# Altium PCB Motorkort.PcbDoc
Units mm, origin at the board's own origin, x right, y up, seen from the top; angles counter-clockwise.
Board outline 60 x 90 mm, 2 copper layers (Top Layer, Bottom Layer); 29 components, 60 nets, 209 pads, 51 vias.
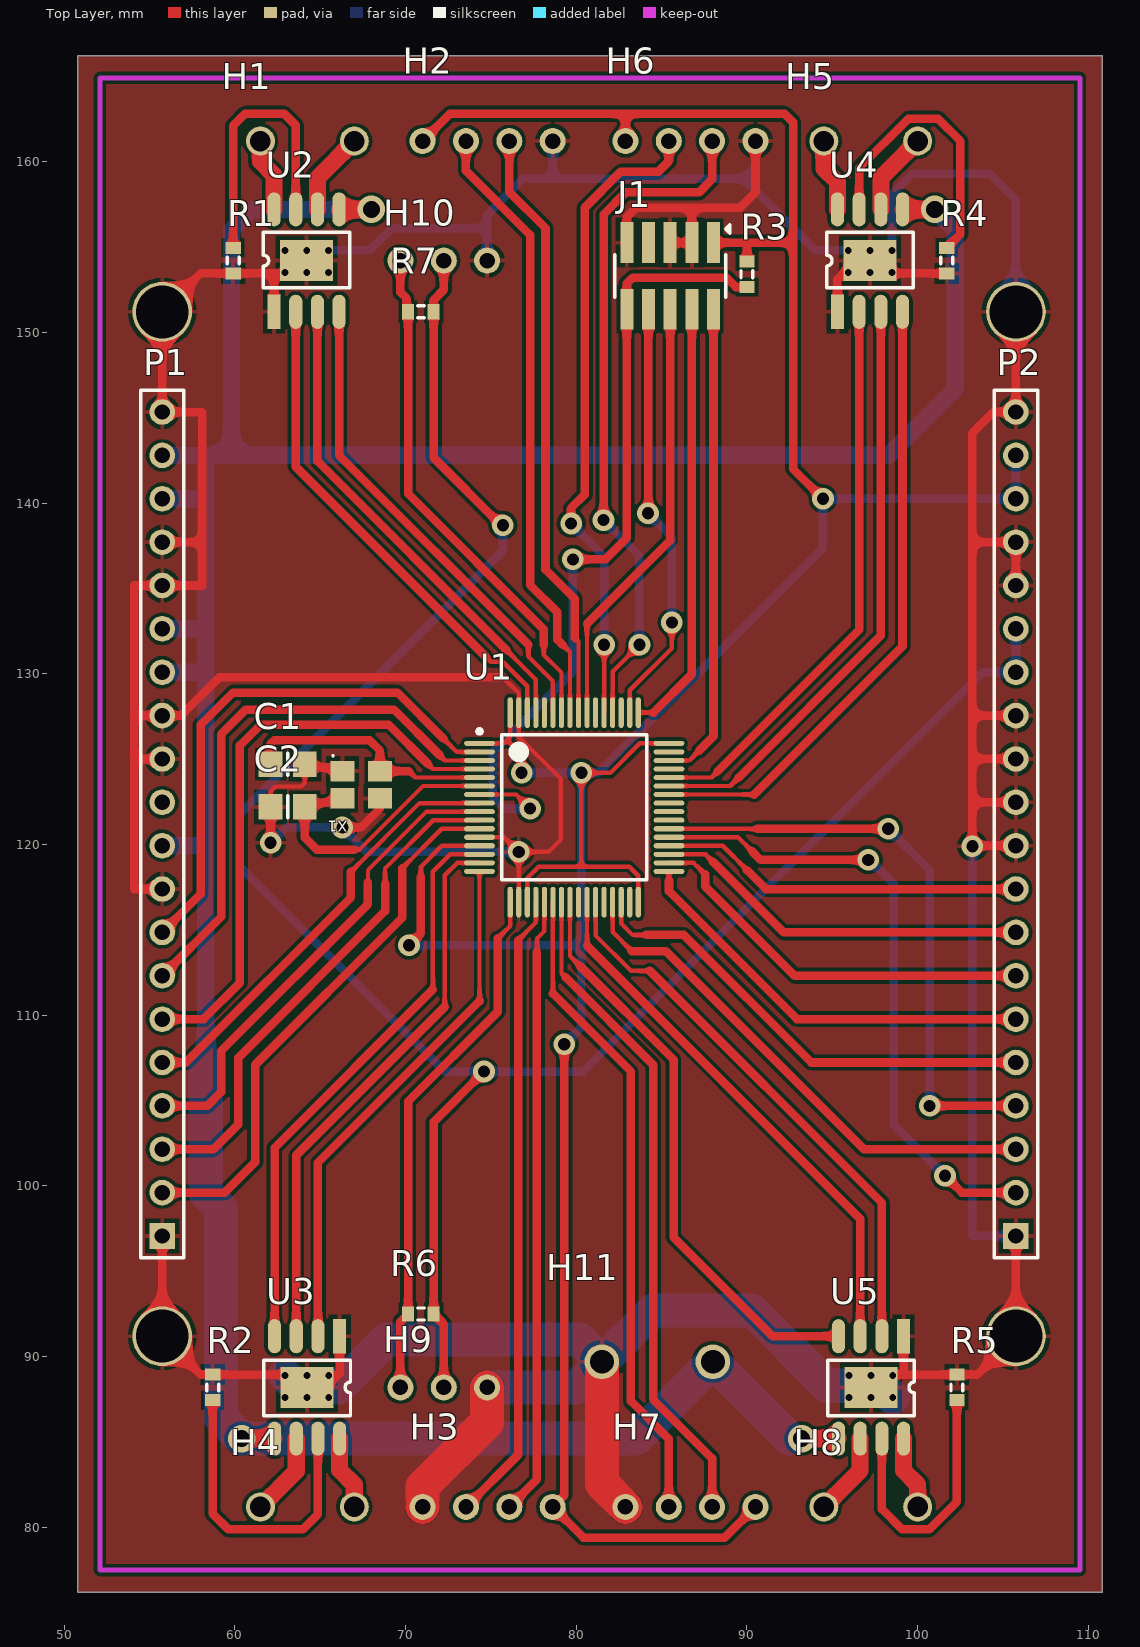
[diagram p0: Top Layer view]
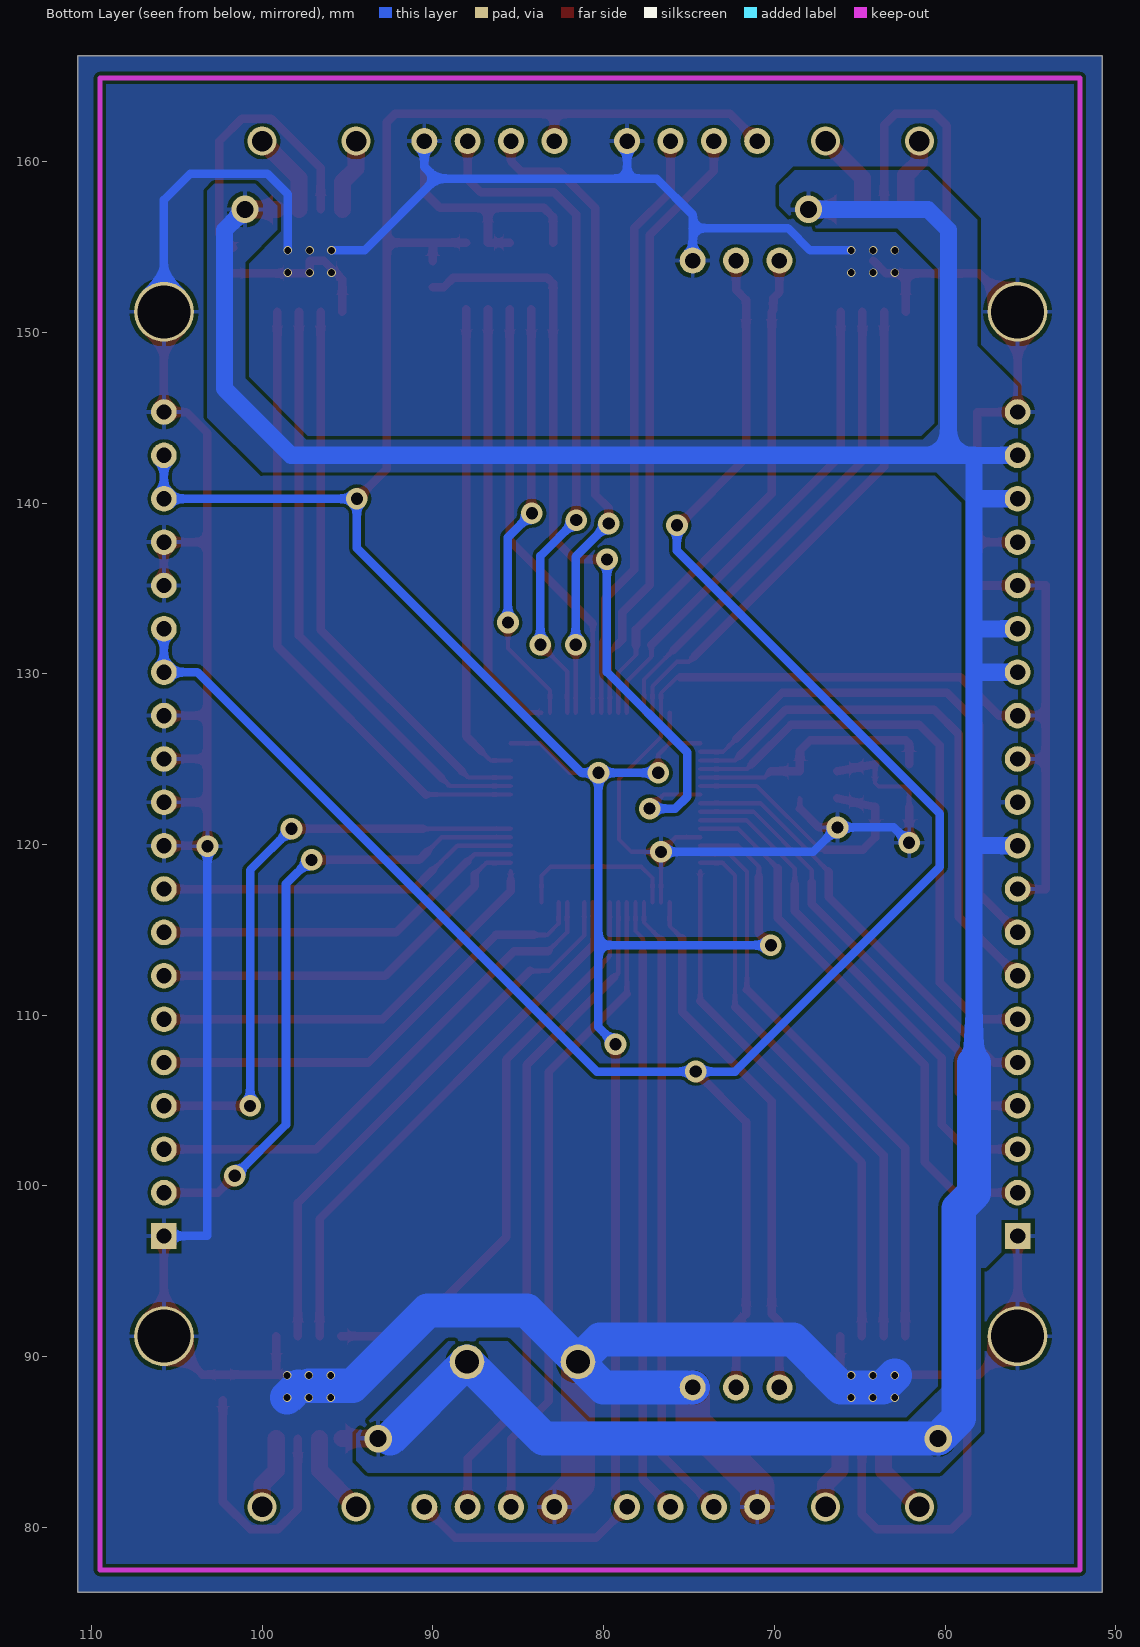
[diagram p1: Bottom Layer view, seen from below]

## Layer stack, top to bottom
Top Solder: solder mask 0.0102, Solder Resist, Dk 3.5
Top Layer: signal copper 0.0356
Dielectric 1: dielectric 0.32, FR-4, Dk 4.8
Bottom Layer: signal copper 0.0356
Bottom Solder: solder mask 0.0102, Solder Resist, Dk 3.5

## Board outline
50.8,76.2 110.8,76.2 110.8,166.2 50.8,166.2

## Design rules (kind name [scope] priority, off if disabled: settings)
Clearance [All] p1: gap=0.2 ignorepadtopadclearanceinfootprint=TRUE
HoleSize [All] p1: absolutevalues=TRUE maxlimit=4 minlimit=0.025 maxpercent=80.000 minpercent=20.000
MinimumSolderMaskSliver [All] p1: minsoldermaskwidth=0
PolygonConnect PolygonDRV8870 [All vs HasFootprint('DRV8p')] p1: thpad.connectstyle=Relief thpad.reliefconductorwidth=0.254 thpad.reliefentries=4 thpad.polygonreliefangle="90 Angle" thpad.airgapwidth=0.254 smdpad.connectstyle=Relief smdpad.reliefconductorwidth=0.254 smdpad.reliefentries=4 smdpad.polygonreliefangle="90 Angle" smdpad.airgapwidth=0.254 via.connectstyle=Direct via.reliefconductorwidth=0.254 via.reliefentries=4 via.polygonreliefangle="90 Angle" via.airgapwidth=0.254
PolygonConnect [All] p2: connectstyle=Relief reliefconductorwidth=0.254 reliefentries=4 polygonreliefangle="90 Angle" airgapwidth=0.254
RoutingVias [All] p1: holewidth=0.635 width=1 viastyle="Through Hole" minholewidth=0.711 minwidth=1.27 maxholewidth=0.711 maxwidth=1.27
SilkToSilkClearance [All] p1: silktosilkclearance=0
SilkToSolderMaskClearance [IsPad] p1: minsilkscreentomaskgap=0 clearancetoexposedcopper=TRUE
SolderMaskExpansion [All] p1: expansion=0.102
Width [All] p1: maxlimit=2 minlimit=0.254 preferedwidth=0.5
26 further rules are at their usual default settings.

## Components (designator, comment, footprint, x,y, rotation, side; value= is the part's Value field where it differs from the comment)
C1 "Cap" 6-0805_M 63.1,124.7 r180 top value=22pF
C2 "Cap" 6-0805_M 63.1,122.2 r0 top value=22pF
H1 "Motorheader" Motorheader 67,161.2 r180 top
H2 "Sensorheader" Sensorheader 78.62,161.2 r180 top
H3 "Sensorheader" Sensorheader 71,81.2 r0 top
H4 "Motorheader" Motorheader 61.5,81.2 r0 top
H5 "Motorheader" Motorheader 100,161.2 r180 top
H6 "Sensorheader" Sensorheader 90.5,161.2 r180 top
H7 "Sensorheader" Sensorheader 82.88,81.2 r0 top
H8 "Motorheader" Motorheader 94.5,81.2 r0 top
H9 "Servoheader" Servoheader 74.78,88.2 r180 top
H10 "Servoheader" Servoheader 74.78,154.2 r180 top
H11 "Batteryheader" Batteryheader 88,89.7 r180 top
J1 "SWD" hdr_2x5_50mil 85.5,153.3 r180 top
P1 "Header 20" HDR1X20 55.75,97.07 r90 top
P2 "Header 20" HDR1X20 105.75,97.07 r90 top
R1 "Res3" J1-0603 59.9,154.2 r90 top value=1K
R2 "Res3" J1-0603 58.7,88.2 r270 top value=1K
R3 "Res3" J1-0603 90,153.4 r90 top value=1K
R4 "Res3" J1-0603 101.7,154.2 r90 top value=1K
R5 "Res3" J1-0603 102.3,88.2 r270 top value=1K
R6 "Res3" J1-0603 70.9,92.5 r0 top value=1K
R7 "Res3" J1-0603 70.9,151.2 r0 top value=1K
U1 "STM32F415RGT6" STM-LQFP64_N 79.883,122.174 r0 top
U2 "drv8870" DRV8p 62.3,151.2 r90 top
U3 "drv8870" DRV8p 66.14,91.2 r270 top
U4 "drv8870" DRV8p 95.3,151.2 r90 top
U5 "drv8870" DRV8p 99.17,91.2 r270 top
X1 "FA-238" DFN220P320X70-4N 67.4,123.5 r0 top

## Footprints (in the part's own frame and the unit in brackets; to place one, negate y for a bottom-side part, rotate by r counter-clockwise, add the part's x,y. Pads: shape width x height; smd on the part's side, far side on the other; paste and mask are expansions set on the pad)
6-0805_M [mm] "Chip Resistor, Body 2.0x1.2mm, IPC Low Density"
  rect 1.4x1.5 smd: 1(-1,0) 2(1,0)
  silkscreen extent 0,-0.65 0,0.65, body extent -1.07,-0.7 1.07,0.7, height 0.7
Batteryheader [mil]
  round 80 hole 55.12: 0(0,0) 1(255.91,0)
DFN220P320X70-4N [mm] "DFN, 4-Leads, Body 2.50x3.20mm, Pitch 2.20mm, IPC Medium Density"
  rect 1.4x1.2 smd: 1(-1.1,-0.8) 2(1.1,0.8) SHIELD(-1.1,0.8) SHIELD(1.1,-0.8)
  silkscreen extent -1.7,1.65 -1.6,1.75, body extent -1.7,-1.35 1.7,1.35, height 0.7
DRV8p [mm]
  rect 2.4x3.1 smd: 0(3,-1.905)
  rect 2x0.77 smd: 1(0,0)
  oval 2x0.77 smd: 2(0,-1.27) 3(0,-2.54) 4(0,-3.81) 5(6,-3.81) 6(6,-2.54) 7(6,-1.27) 8(6,0)
  silkscreen extent 1.4,-4.44 4.65,0.64
HDR1X20 [mm] "Connector; Header; 20 Position"
  rect 1.5x1.5 hole 0.9: 1(0,0)
  round 1.5 hole 0.9: 2(2.54,0) 3(5.08,0) 4(7.62,0) 5(10.16,0) 6(12.7,0) 7(15.24,0) 8(17.78,0) 9(20.32,0) 10(22.86,0) 11(25.4,0) 12(27.94,0) 13(30.48,0) 14(33.02,0) 15(35.56,0) 16(38.1,0) 17(40.64,0) 18(43.18,0) 19(45.72,0) 20(48.26,0)
  silkscreen extent -1.27,-1.27 49.53,1.27
hdr_2x5_50mil [mm] "2x5 Pin header, 50mil pitch"
  rect 0.76x2.4 smd: 1(-2.54,-1.95) 2(-2.54,1.95) 2(-2.54,1.95) 3(-1.27,-1.95) 4(-1.27,1.95) 5(0,-1.95) 6(0,1.95) 7(1.27,-1.95) 8(1.27,1.95) 9(2.54,-1.95) 10(2.54,1.95)
  silkscreen extent -3.5,-3 3.25,1.25, body extent -3.17,-2.75 3.18,2.75, height 4.5
J1-0603 [mm] "Chip Resistor, Body 1.6x0.8mm, IPC High Density"
  rect 0.7x0.9 smd: 1(-0.75,0) 2(0.75,0)
  silkscreen extent -0.2,-0.35 0.2,0.35, body extent -0.85,-0.48 0.85,0.48, height 0.9
Motorheader [mm]
  round 1.7 hole 1.2: 0(0,0) 1(5.5,0)
Sensorheader [mil]
  round 60 hole 35.43: 0(0,0) 1(100,0) 2(200,0) 3(300,0)
Servoheader [mil]
  round 60 hole 35.43: 0(0,0) 1(100,0) 2(200,0)
STM-LQFP64_N [mm] "Thin QFP, 64-Leads, Body 10x10mm, Pitch 0.5mm, IPC Medium Density"
  oval 1.8x0.3 smd: 1(-5.55,3.75) 2(-5.55,3.25) 3(-5.55,2.75) 4(-5.55,2.25) 5(-5.55,1.75) 6(-5.55,1.25) 7(-5.55,0.75) 8(-5.55,0.25) 9(-5.55,-0.25) 10(-5.55,-0.75) 11(-5.55,-1.25) 12(-5.55,-1.75) 13(-5.55,-2.25) 14(-5.55,-2.75) 15(-5.55,-3.25) 16(-5.55,-3.75) 33(5.55,-3.75) 34(5.55,-3.25) 35(5.55,-2.75) 36(5.55,-2.25) 37(5.55,-1.75) 38(5.55,-1.25) 39(5.55,-0.75) 40(5.55,-0.25) 41(5.55,0.25) 42(5.55,0.75) 43(5.55,1.25) 44(5.55,1.75) 45(5.55,2.25) 46(5.55,2.75) 47(5.55,3.25) 48(5.55,3.75)
  oval 0.3x1.8 smd: 17(-3.75,-5.55) 18(-3.25,-5.55) 19(-2.75,-5.55) 20(-2.25,-5.55) 21(-1.75,-5.55) 22(-1.25,-5.55) 23(-0.75,-5.55) 24(-0.25,-5.55) 25(0.25,-5.55) 26(0.75,-5.55) 27(1.25,-5.55) 28(1.75,-5.55) 29(2.25,-5.55) 30(2.75,-5.55) 31(3.25,-5.55) 32(3.75,-5.55) 49(3.75,5.55) 50(3.25,5.55) 51(2.75,5.55) 52(2.25,5.55) 53(1.75,5.55) 54(1.25,5.55) 55(0.75,5.55) 56(0.25,5.55) 57(-0.25,5.55) 58(-0.75,5.55) 59(-1.25,5.55) 60(-1.75,5.55) 61(-2.25,5.55) 62(-2.75,5.55) 63(-3.25,5.55) 64(-3.75,5.55)
  silkscreen extent -5.67,-4.25 4.25,4.57, body extent -5,-5 5,5, height 1.6

## Part data
C1 C2: "Capacitor", LatestRevisionDate=17-Jul-2002, LatestRevisionNote="Re-released for DXP Platform.", PackageDescription="Radial Cap, Thru-Hole; 2 Leads; 0.3 in Pin Spacing", PackageReference=RAD-0.3, Published=8-Jun-2000, Publisher="Altium Limited"
J1: library part hdr_swd, "SWD Header"
P1 P2: "Header, 20-Pin", LatestRevisionDate=17-Jul-2002, LatestRevisionNote="Re-released for DXP Platform.", Publisher="Altium Limited"
R1 R2 R3 R4 R5 R6 R7: "Resistor", LatestRevisionDate=29-May-2009, LatestRevisionNote="IPC-7351 Footprint Added.", PackageDescription="Chip Resistor", PackageReference=J1-0603, Published=8-Jun-2000, Publisher="Altium Limited"
U1: "ARM Cortex-M4 32-bit MCU+FPU, 210 DMIPS, 1024 kB Flash, 192 kB Internal RAM, 51 I/Os, 64-pin LQFP, -40 to 85 degC, Tray", I/Os (High Current)=51, Manufacturer=STMicroelectronics, Operating Frequency(F) (Processor speed) (MHz)=168, Supplier Part Number 1=497-11907-ND, Supply Voltage(Vcc) max (V)=3.6, Supply Voltage(Vcc) min (V)=1.8, ComponentLink1Description="Manufacturer URL", ComponentLink1URL=http://www.st.com/web/en/home.html, ComponentLink2Description=Datasheet, ComponentLink2URL=http://www.st.com/st-web-ui/static/active/en/resource/technical/document/datasheet/DM00035129.pdf, ComponentLink3Description="Package Specification", ComponentLink3URL=http://www.st.com/st-web-ui/static/active/en/resource/technical/document/datasheet/DM00037051.pdf, Core="ARM Cortex-M4", D/A Converter=2x12-bit, DatasheetVersion="Rev. 4", FLASH Size (Prog) (kB)=1024, Internal RAM Size (kB)=192, Mounting Technology="Surface Mount", PackageDescription="64-Pin Low Profile Quad Flat Package, 10 x 10 mm Body, 0.5 mm Pitch", PackageReference=LQFP64, PackageVersion="Rev. 4, 06/2013", Packing=Tray, PartNumber=STM32F415RGT6, Supplier 1=Digi-Key, Supplier 2=Farnell, Supplier 3=Newark, Supplier 4=Mouser, Supplier Part Number 2=2064370, Supplier Part Number 3=73T2335, Supplier Part Number 4=511-STM32F415RGT6
X1: library part crystal, "Crystal With Shield", freq=25MHz

## Free pads (board coordinates)
  round 3.5 hole 3.1: 8(55.75,151.2) 9(105.75,151.2) 10(55.75,91.2) 11(105.75,91.2)

## Via types
v1: diameter 0.5, hole 0.4, Top Layer to Bottom Layer, 24 vias
v2: diameter 1.27, hole 0.711, Top Layer to Bottom Layer, tented both sides, 23 vias
v3: diameter 1.6, hole 1, Top Layer to Bottom Layer, 4 vias

## Nets (pads, with @x,y where several pads share a name; then routed paths per layer and width w, separated by ;. In a path a pad name is that pad's centre, name@x,y a point inside that pad or via, vN(x,y) a via of type N, cw(c..) or ccw(c..) an arc to the next point about the centre after c; other vN are vias at no path point)
CLK1: C1.2 U1.5 X1.2 | length 15.1
  Top Layer w0.254: 70.2,124.3 70.576,123.924 U1.5
  Top Layer w0.5: C1.2 62.1,125.9 62.3,126.1 67.9,126.1 68.5,125.5 X1.2 70.2,124.3
CLK2: C2.2 U1.6 X1.1 | length 16.1
  Top Layer w0.254: 67,119.7 67.3,119.7 71.024,123.424 U1.6
  Top Layer w0.5: X1.1 C2.2 64.1,120.4 64.8,119.7 67,119.7
D1_F: U1.61 U2.3 | length 28.8
  Top Layer w0.254: 75.9,131.4 77.633,129.667 U1.61
  Top Layer w0.5: U2.3 64.84,142.46 75.9,131.4
D1_R: U1.62 U2.2 | length 29.5
  Top Layer w0.254: 74.7,131 75,130.7 75.7,130.7 77.133,129.267 U1.62
  Top Layer w0.5: U2.2 63.57,142.13 74.7,131
D2_F: U1.15 U3.3 | length 32.9
  Top Layer w0.254: 72.3,110.5 72.3,118.2 73.024,118.924 U1.15
  Top Layer w0.5: U3.3 63.6,101.8 72.3,110.5
D2_R: U1.16 U3.2 | length 31.1
  Top Layer w0.254: 74.333,110.833 U1.16
  Top Layer w0.5: U3.2 64.87,101.37 74.333,110.833
D3_F: U1.43 U4.3 | length 35
  Top Layer w0.254: U1.43 89.024,123.424 89.5,123.9
  Top Layer w0.5: 89.5,123.9 97.84,132.24 U4.3
D3_R: U1.44 U4.2 | length 33.3
  Top Layer w0.254: U1.44 87.924,123.924 88.3,124.3
  Top Layer w0.5: 88.3,124.3 96.57,132.57 U4.2
D4_F: U1.26 U5.3 | length 32.1
  Top Layer w0.254: 80.633,114.067 U1.26
  Top Layer w0.5: 80.633,114.067 96.63,98.07 U5.3
D4_R: U1.27 U5.2 | length 33
  Top Layer w0.254: U1.27 81.133,114.667 83.2,112.6 84.3,112.6
  Top Layer w0.5: 84.3,112.6 97.9,99 U5.2
GND: C1.1 C2.1 H2.0 H3.0 H6.0 H7.0 H9.0 H10.0 H11.1 J1.3 J1.5 J1.9 P1.1 P1.9 P1.12 P1.13 P1.16 P1.17 P1.20 P2.1 P2.10 P2.11 P2.12 P2.13 P2.16 P2.17 P2.20 pad.8 pad.9 pad.10 pad.11 R1.1 R2.1 R4.1 R5.1 U1.12 U1.18 U1.63 U2.0 U2.1 U3.0 U3.1 U4.0 U4.1 U5.0 U5.1 X1.SHIELD | length 387.1
  Top Layer w0.254: C2.1 62.1,123.1 62.4,123.4 63.9,123.4 64.1,123.6 C1.1 ; 68.5,122.1 X1.SHIELD@68.5,122.7 ; U1.12 75.776,120.424 v2(76.633,119.567) ; 75.5,129.8 75.7,129.8 76.633,128.867 U1.63 76.633,126.3 79.1,123.833 79.1,120.3 78.367,119.567 v2(76.633,119.567) ; U1.18 v2(76.633,119.567)
  Top Layer w0.5: P1.1 pad.10 58,88.95 R2.1 U3.0@63.485,88.95 ; P1.9 54.1,117.39 54.1,125 ; P1.12 55.75,125 54.1,125 ; P1.17 58.1,137.71 ; v2(62.1,120.1) C2.1 ; U2.1 62.3,153.45 ; C1.1 X1.SHIELD@66.3,124.3 ; U2.0 63.455,153.45 62.3,153.45 ; U3.0 65.3,88.2 66.14,89.04 U3.1 ; v2(66.3,121) 67.4,121 68.5,122.1 ; 75.5,129.8 59.1,129.8 56.85,127.55 P1.13 54.1,127.55 ; J1.9 82.96,156.76 83.5,157.3 86.77,157.3 ; J1.5 J1.3 86.77,157.3 ; H6.0 90.5,158.2 89.6,157.3 86.77,157.3 ; U4.1 95.3,153.1 96.4,154.2 U4.0 97.205,153.45 R4.1 ; U5.0@98.535,88.95 99.2,88.95 ; U5.1 99.17,88.98 99.2,88.95 ; P2.1 pad.11 103.5,88.95 R5.1 99.2,88.95 ; P2.10 103.2,119.93 103.2,122.47 ; P2.11 103.2,122.47 ; P2.12 103.2,125.01 ; P2.13 103.2,127.55 ; P2.16 P2.17 103.2,137.71 ; pad.9 P2.20 104.43,145.33 103.2,144.1 103.2,137.71 ; 54.1,125 54.1,127.55 ; 54.1,127.55 54.1,135.17 P1.16 58.1,135.17 58.1,137.71 ; 58.1,137.71 58.1,145.33 P1.20 pad.8 58,153.45 R1.1 62.3,153.45 ; 103.2,122.47 103.2,125.01 ; 103.2,125.01 103.2,127.55 ; 103.2,127.55 103.2,137.71
  Top Layer w2: H3.0 71,82.4 74.78,86.18 H9.0 ; H11.1 81.5,82.58 H7.0
  Bottom Layer w0.5: v2(62.1,120.1) 63,121 v2(66.3,121) 67.733,119.567 v2(76.633,119.567) ; v1(65.495,154.8) 67.9,154.8 69.2,156.1 74.78,156.1 ; H10.0 74.78,156.1 ; H2.0 78.62,159 ; H6.0 90.5,159.7 89.8,159 ; v1(95.935,154.8) 94,154.8 89.8,159 ; v1(97.255,88.9) v1(98.535,88.9) ; v1(98.495,154.8) 98.495,158.095 99.7,159.3 104.2,159.3 105.75,157.75 pad.9 ; v2(103.2,119.9) 103.2,97.07 P2.1 ; 74.78,156.1 74.78,156.88 76.9,159 78.62,159 ; 78.62,159 89.8,159
  Bottom Layer w2: v1(62.945,88.9) 63.645,88.2 66.1,88.2 68.9,91 80.2,91 H11.1 ; H9.0 80,88.2 H11.1 ; 97.255,88.3 94.7,88.3 90.3,92.7 84.5,92.7 H11.1 ; 97.885,88.25 v1(98.535,87.6)
  other v1: 62.945,87.6 64.225,87.6 65.505,87.6 95.975,87.6 97.255,87.6 64.225,88.9 65.505,88.9 95.975,88.9 62.935,153.5 64.215,153.5 65.495,153.5 95.935,153.5 97.215,153.5 98.495,153.5 62.935,154.8 64.215,154.8 97.215,154.8
INT: P2.2 U1.37 | length 37.2
  Top Layer w0.254: U1.37 89.476,120.424 90.3,119.6
  Top Layer w0.5: 90.3,119.6 90.8,119.1 v2(97.1,119.1) ; v2(101.6,100.6) 102.59,99.61 P2.2
  Bottom Layer w0.5: v2(97.1,119.1) 97.2,119.1 98.6,117.7 98.6,103.6 v2(101.6,100.6)
NC/TDI: J1.8 U1.50 | length 25.2
  Top Layer w0.254: U1.50 83.133,129.033 85.6,131.5 v2(85.6,133)
  Top Layer w0.5: v2(84.2,139.4) 84.23,139.43 J1.8
  Bottom Layer w0.5: v2(84.2,139.4) 85.6,138 v2(85.6,133)
NC/TDO: J1.6 U1.55 | length 25.6
  Top Layer w0.254: U1.55 80.633,132.9
  Top Layer w0.5: 80.633,132.9 80.633,132.933 85.5,137.8 J1.6
NetH1_0: H1.0 U2.6 | length 4.9
  Top Layer w1: U2.6 64.84,159.04 H1.0
NetH1_1: H1.1 U2.8 | length 4.3
  Top Layer w1: H1.1 61.5,160 62.3,159.2 U2.8
NetH4_0: H4.0 U3.6 | length 4.9
  Top Layer w1: H4.0 63.6,83.3 U3.6
NetH4_1: H4.1 U3.8 | length 4.4
  Top Layer w1: U3.8 66.14,83.36 67,82.5 H4.1
NetH5_0: H5.0 U4.6 | length 4.9
  Top Layer w1: U4.6 97.84,159.04 H5.0
NetH5_1: H5.1 U4.8 | length 4.3
  Top Layer w1: H5.1 94.5,159.6 95.3,158.8 U4.8
NetH8_0: H8.0 U5.6 | length 4.9
  Top Layer w1: H8.0 96.63,83.33 U5.6
NetH8_1: H8.1 U5.8 | length 4.3
  Top Layer w1: U5.8 99.17,83.33 100,82.5 H8.1
NetR1_2: R1.2 U2.7 | length 16.3
  Top Layer w0.5: R1.2 59.9,162.1 60.6,162.8 62.9,162.8 63.57,162.13 U2.7
NetR2_2: R2.2 U3.7 | length 18
  Top Layer w0.5: R2.2 58.7,80.8 59.612,79.888 63.988,79.888 64.87,80.77 U3.7
NetR4_2: R4.2 U4.7 | length 16.7
  Top Layer w0.5: U4.7 96.57,159.625 99.457,162.512 101.188,162.512 102.5,161.2 102.5,155.75 R4.2
NetR5_2: R5.2 U5.7 | length 15.6
  Top Layer w0.5: U5.7 97.9,81.076 99.088,79.888 100.688,79.888 102.3,81.5 R5.2
NRST: J1.10 R3.1 U1.7 | length 47.6
  Top Layer w0.254: U1.7 76.476,122.924 v2(77.3,122.1)
  Top Layer w0.5: v2(79.8,136.7) 81.7,136.7 82.96,137.96 J1.10 82.96,152.86 83.3,153.2 88.8,153.2 89.35,152.65 R3.1
  Bottom Layer w0.5: v2(77.3,122.1) 75.8,122.1 75.1,122.8 75.1,125.4 79.8,130.1 v2(79.8,136.7)
PC0: P1.5 U1.8 | length 25.8
  Top Layer w0.254: 66.8,118.4 70.824,122.424 U1.8
  Top Layer w0.5: P1.5 57.13,107.23 66.8,116.9 66.8,118.4
PC1: P1.4 U1.9 | length 28.3
  Top Layer w0.254: 67.8,117.8 67.8,118.5 71.224,121.924 U1.9
  Top Layer w0.5: P1.4 58.39,104.69 59.2,105.5 59.2,107.9 67.8,116.5 67.8,117.8
PC2: P1.3 U1.10 | length 30.3
  Top Layer w0.254: 68.8,117.7 68.8,118.6 71.624,121.424 U1.10
  Top Layer w0.5: P1.3 58.75,102.15 60.2,103.6 60.2,107.5 68.8,116.1 68.8,117.7
PC3: P1.2 U1.11 | length 32.4
  Top Layer w0.254: 69.8,118.6 72.124,120.924 U1.11
  Top Layer w0.5: P1.2 59.41,99.61 61.2,101.4 61.2,107.1 69.8,115.7 69.8,118.6
PC13: P1.8 U1.2 | length 31.6
  Top Layer w0.254: 72.212,126.212 73,125.424 U1.2
  Top Layer w0.5: P1.8 58,117.1 58,127 59.9,128.9 69.524,128.9 72.212,126.212
PC14: P1.7 U1.3 | length 32.5
  Top Layer w0.254: 72,125.224 72.3,124.924 U1.3
  Top Layer w0.5: P1.7 59.2,115.76 59.2,126.46 60.64,127.9 69.324,127.9 72,125.224
PC15: P1.6 U1.4 | length 34.9
  Top Layer w0.254: 71.3,124.724 71.6,124.424 U1.4
  Top Layer w0.5: P1.6 58.17,109.77 60.3,111.9 60.3,125.8 61.5,127 69.024,127 71.3,124.724
SCL: P2.3 U1.29 | length 30.6
  Top Layer w0.254: U1.29 82.133,114.867 83.25,113.75
  Top Layer w0.5: 83.25,113.75 85.25,113.75 96.85,102.15 P2.3
SDA: P2.4 U1.38 | length 35.1
  Top Layer w0.254: U1.38 90.6,120.924
  Top Layer w0.5: 90.6,120.924 v2(98.276,120.924) ; v2(100.7,104.69) P2.4
  Bottom Layer w0.5: v2(98.276,120.924) 100.7,118.5 v2(100.7,104.69)
Servo1_TIM2_CH3: H9.2 R6.1 U1.17 | length 31.1
  Top Layer w0.254: 75.4,114.5 76.133,115.233 U1.17
  Top Layer w0.5: H9.2 69.7,92.05 R6.1 70.15,104.95 75.4,110.2 75.4,114.5
Servo2_TIM2_CH4: H10.2 R7.1 U1.58 | length 30.3
  Top Layer w0.254: R7.1@70.05,151.2 R7.1@70.05,151.3 ; 78.1,131.7 78.1,131.1 79.133,130.067 U1.58
  Top Layer w0.5: H10.2 69.7,152.35 70.05,152 R7.1@70.05,151.3 ; R7.1 70.15,140.55 78.1,132.6 78.1,131.7
SPI_INT: P2.5 U1.30 | length 27.7
  Top Layer w0.254: U1.30 82.633,115.367 83.3,114.7 84.1,114.7
  Top Layer w0.5: 84.1,114.7 86.3,114.7 93.77,107.23 P2.5
SPI_MISO: P2.8 U1.35 | length 22.2
  Top Layer w0.254: U1.35 87.576,119.424 88,119
  Top Layer w0.5: 88,119 92.15,114.85 P2.8
SPI_MOSI: P2.9 U1.36 | length 21.4
  Top Layer w0.254: U1.36 88.576,119.924 90,118.5
  Top Layer w0.5: 90,118.5 91.11,117.39 P2.9
SPI_NSS: P2.6 U1.33 | length 24.6
  Top Layer w0.254: 85.433,117.867 U1.33
  Top Layer w0.5: 85.433,117.867 85.433,117.267 92.93,109.77 P2.6
SPI_SCK: P2.7 U1.34 | length 23.5
  Top Layer w0.254: U1.34 86.876,118.924 87.55,118.25
  Top Layer w0.5: 87.55,118.25 87.55,117.55 92.79,112.31 P2.7
SWC/TCK: J1.4 U1.49 | length 25.4
  Top Layer w0.254: U1.49 84.524,127.724
  Top Layer w0.5: 84.524,127.724 86.77,129.97 J1.4
SWD/TMS: J1.2 U1.46 | length 28.2
  Top Layer w0.254: U1.46 86.624,124.924 87.2,125.5
  Top Layer w0.5: 87.2,125.5 88.04,126.34 J1.2@88.04,151.35
V3.3: H2.3 H3.3 H6.3 H7.3 J1.1 P2.18 P2.19 R3.2 U1.1 U1.13 U1.19 U1.32 U1.48 U1.64 | length 195.5
  Top Layer w0.254: 70.9,118.1 70.9,118.7 72.124,119.924 U1.13 ; U1.1 75.724,125.924 75.929,126.129 ; U1.64 76.133,126.333 75.929,126.129 ; v2(76.8,124.2) 76.8,125.257 75.929,126.129 ; U1.19 77.133,118.033 77.8,118.7 80.3,118.7 ; U1.32 83.633,118.167 83.1,118.7 80.3,118.7 ; U1.48 83.724,125.924 82,124.2 v2(80.3,124.2) 80.3,118.7
  Top Layer w0.5: v2(70.2,114.1) 70.9,114.8 70.9,118.1 ; H2.3 72.6,162.8 82.88,162.8 ; v2(79.3,108.3) 79.3,81.88 H3.3 80.42,79.4 88.7,79.4 H7.3 ; H6.3 82.88,162.8 ; J1.1 89.85,155.25 ; R3.2 90,155.1 89.85,155.25 ; v2(94.45,140.25) 92.7,142 92.7,155.25 ; 82.88,162.8 92.2,162.8 92.7,162.3 92.7,155.25 ; 89.85,155.25 92.7,155.25
  Bottom Layer w0.5: v2(70.2,114.1) 80.3,114.1 ; v2(76.8,124.2) v2(80.3,124.2) ; v2(79.3,108.3) 80.3,109.3 80.3,114.1 ; P2.19 P2.18 v2(94.45,140.25) 94.45,137.35 81.3,124.2 v2(80.3,124.2) ; 80.3,114.1 v2(80.3,124.2)
V5.0: H9.1 H10.1 P2.14 P2.15 R6.2 R7.2 | length 126.5
  Top Layer w0.5: H9.1 72.24,91.91 R6.2 71.65,103.75 v2(74.6,106.7) ; H10.1 72.24,152.49 71.65,151.9 R7.2 71.65,142.65 75.6,138.7 v2(75.7,138.7)
  Bottom Layer w0.5: v2(75.7,138.7) 75.7,137.2 60.3,121.8 60.3,118.7 72.3,106.7 v2(74.6,106.7) 80.4,106.7 103.79,130.09 P2.14 P2.15
V_Motor: H11.0 P1.10 P1.11 P1.14 P1.15 P1.18 P1.19 U2.5 U3.5 U4.5 U5.5 | length 194.1
  Top Layer w1: v3(60.4,85.2) U3.5@62.3,85.2 ; U2.5@66.14,157.2 v3(68,157.2) ; v3(93.2,85.2) U5.5@95.33,85.2 ; U4.5@99.14,157.2 v3(101,157.2)
  Bottom Layer w1: P1.10 58.23,119.93 58.3,120 ; P1.14 58.11,130.09 58.3,129.9 ; P1.15 58.17,132.63 58.3,132.5 ; P1.18 58.15,140.25 58.3,140.1 ; P1.19 58.29,142.79 58.3,142.8 ; 58.3,107.2 58.3,120 ; v3(68,157.2) 61,157.2 59.8,156 59.8,142.8 ; v3@92.5,85.2 v3(93.2,85.2) ; v3(101,157.2) 102.2,156 102.2,146.7 98.3,142.8 59.8,142.8 ; 58.3,120 58.3,129.9 ; 58.3,129.9 58.3,132.5 ; 58.3,132.5 58.3,140.1 ; 58.3,140.1 58.3,142.8 ; 58.3,142.8 59.8,142.8
  Bottom Layer w2: 58.3,107.2 58.3,99.58 59.2,98.68 59.2,86.4 v3(60.4,85.2) 83.5,85.2 H11.0 v3@92.5,85.2
Vref_m1: U1.59 U2.4 | length 28.7
  Top Layer w0.254: 77.2,131.7 77.2,131 78.633,129.567 U1.59
  Top Layer w0.5: U2.4 66.11,142.79 77.2,131.7
Vref_m2: U1.14 U3.4 | length 34.2
  Top Layer w0.254: 71.6,111.5 71.6,118.4 72.624,119.424 U1.14
  Top Layer w0.5: U3.4 62.33,102.23 71.6,111.5
Vref_m3: U1.42 U4.4 | length 36.9
  Top Layer w0.254: U1.42 90.424,122.924
  Top Layer w0.5: 90.424,122.924 99.11,131.61 U4.4
Vref_m4: U1.24 U5.4 | length 34.2
  Top Layer w0.254: U1.24 79.633,113.467 80.2,112.9
  Top Layer w0.5: 80.2,112.9 85.7,107.4 85.7,97 91.5,91.2 U5.4
Wheel1_1: H2.1 U1.56 | length 35.2
  Top Layer w0.254: 79.9,132.1 80.133,131.867 U1.56
  Top Layer w0.5: H2.1 76.08,158.22 78.2,156.1 78.2,136.1 79.9,134.4 79.9,132.1
Wheel1_2: H2.2 U1.57 | length 36
  Top Layer w0.254: 79.208,131.692 79.633,131.267 U1.57
  Top Layer w0.5: H2.2 73.54,159.46 77.3,155.7 77.3,135.2 78.9,133.6 78.9,132 79.208,131.692
Wheel2_1: H3.1 U1.20 | length 37.1
  Top Layer w0.254: 76.6,114.4 77.633,115.433 U1.20
  Top Layer w0.5: H3.1 76.6,84.26 76.6,114.4
Wheel2_2: H3.2 U1.21 | length 36.3
  Top Layer w0.254: 77.7,113.7 77.7,114.5 78.133,114.933 U1.21
  Top Layer w0.5: H3.2 77.7,82.82 77.7,113.7
Wheel3_1: H6.1 U1.52 | length 40.1
  Top Layer w0.254: U1.52 82.133,130.133 v2(83.7,131.7)
  Top Layer w0.5: v2(81.6,139) 81.6,156.9 82.9,158.2 87.2,158.2 87.96,158.96 H6.1
  Bottom Layer w0.5: v2(81.6,139) 83.7,136.9 v2(83.7,131.7)
Wheel3_2: H6.2 U1.53 | length 38.2
  Top Layer w0.254: U1.53 v2(81.633,131.7)
  Top Layer w0.5: v2(79.7,138.8) 79.7,139.7 80.5,140.5 80.5,157.3 82.6,159.4 84.8,159.4 85.42,160.02 H6.2
  Bottom Layer w0.5: v2(79.7,138.8) 81.633,136.867 81.633,131.867 81.8,131.7 v2(81.633,131.7)
Wheel4_1: H7.1 U1.22 | length 38.2
  Top Layer w0.254: 78.633,111.267 U1.22
  Top Layer w0.5: 78.633,111.267 83.2,106.7 83.2,87.4 85.42,85.18 H7.1
Wheel4_2: H7.2 U1.23 | length 39.1
  Top Layer w0.254: U1.23 79.133,112.467 79.4,112.2
  Top Layer w0.5: 79.4,112.2 84.5,107.1 84.5,87.5 87.96,84.04 H7.2
pads on no net: J1.7 U1.25 U1.28 U1.31 U1.39 U1.40 U1.41 U1.45 U1.47 U1.51 U1.54 U1.60

## Polygon pours and split planes (outlines as drawn)
GND on Bottom Layer "Bottom Layer-GND Plane" (solid, pour order 3): 50.8,76.2 110.8,76.2 110.8,166.2 50.8,166.2
V_Motor on Bottom Layer "Bottom Layer-No Net" (solid, pour order 0): 99.1,156 99.1,157.4 100.4,158.7 102.8,158.7 103.2,158.3 103.2,145 100,141.8 60.5,141.8 58.8,140.1 58.8,89.6 62.2,86.2 80.9,86.2 85.6,90.9 89.1,90.9 94.5,85.5 94.5,83.9 93.8,83.2 60.3,83.2 57.9,85.6 57.9,95.2 57.62,95.2 55.75,97.07 55.75,146.85 58.1,149.2 58.1,156.6 61,159.5 68.8,159.5 69.7,158.6 69.7,157.4 68.4,156.1 62.8,156.1 60.4,153.7 60.4,144.6 61.3,143.7 97.4,143.7 101,147.3 101,154.1
GND on Top Layer "Top Layer-GND Plane" (solid, pour order 2): 50.8,76.2 110.8,76.2 110.8,166.2 50.8,166.2

## Keep-outs
Keep-Out Layer:
  lines w0.3: 52.1,77.5 109.5,77.5 109.5,164.9 52.1,164.9 52.1,77.5

## Silkscreen, mask and mechanical layers (free items; w line width, h text height)
Bottom Solder:
  region: 61.1,152.9 99.7,152.8 99.8,147.6 97.1,144.6 61.1,144.8
  region: 61.2,90.1 83.6,90.1 83.6,93.1 92.8,93.1 92.8,90.1 101.3,90.1 101.3,99.2 97.2,103.4 97.2,105.7 61.2,105.5
Drill Drawing:
  text ".LEGEND" at 115.88,81.28 h1.52
  text "Drill Drawing." at 115.88,78.74 h1.52

## Dimensions
52.1,77.5 to 109.5,77.5 on Mechanical 1
52.1,77.5 to 52.1,164.9 on Mechanical 1